# EAGLE board EE474FINAL (EAGLE 9.5.1)
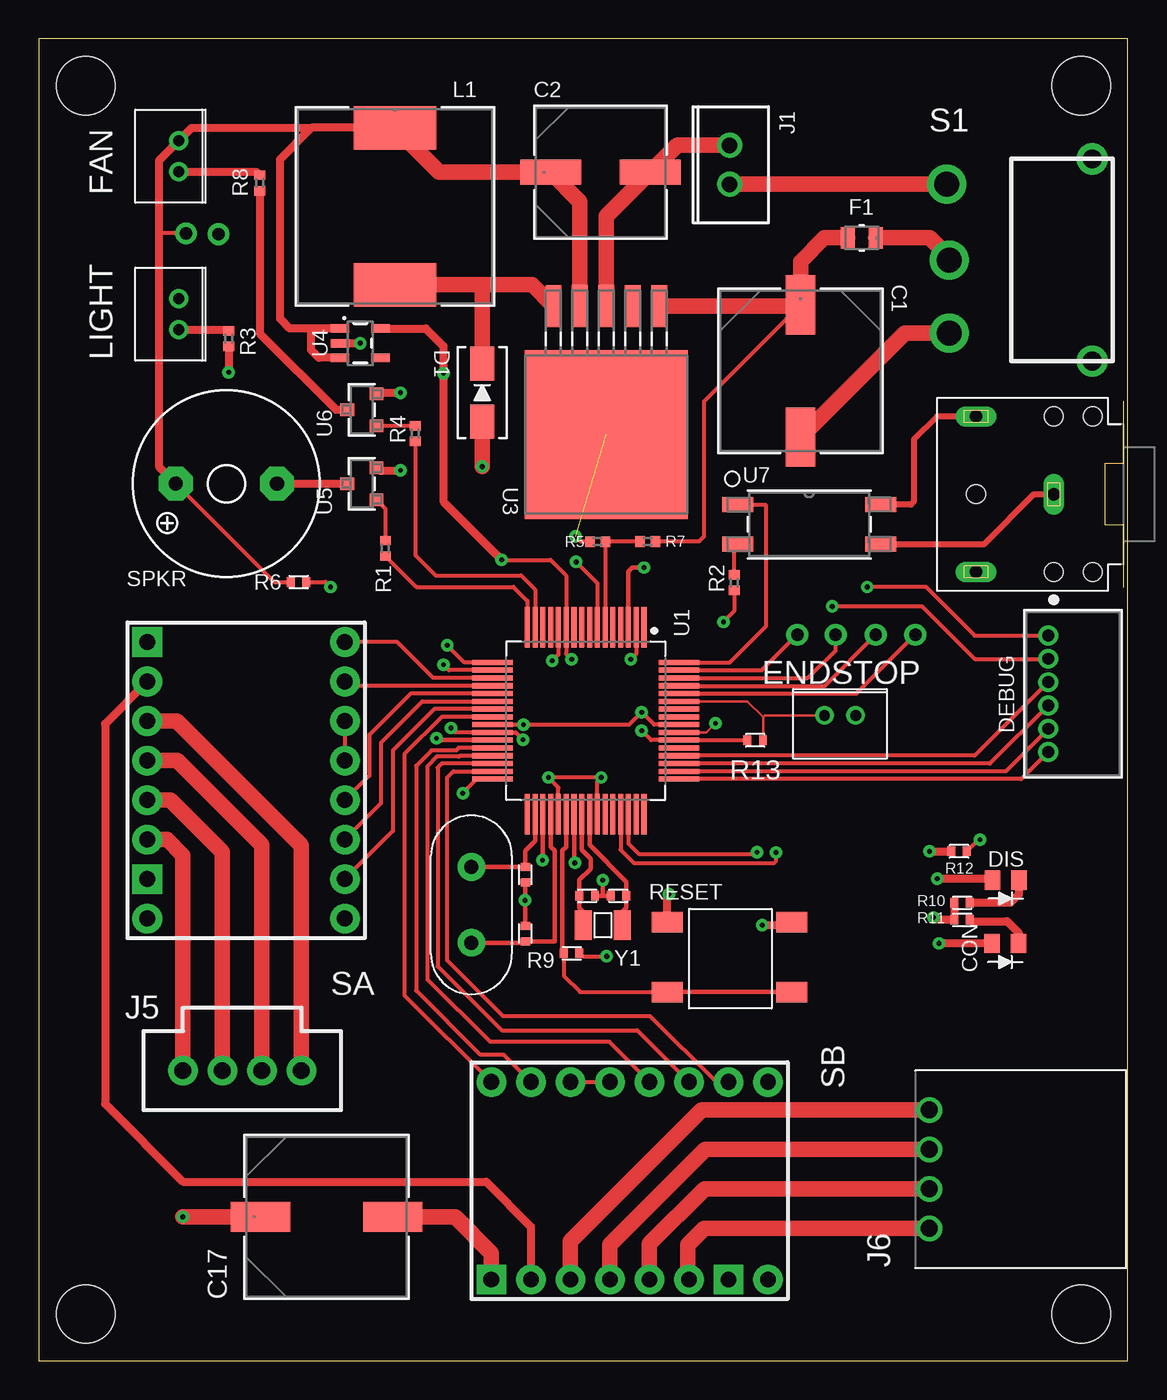
[diagram p0: board, top side]
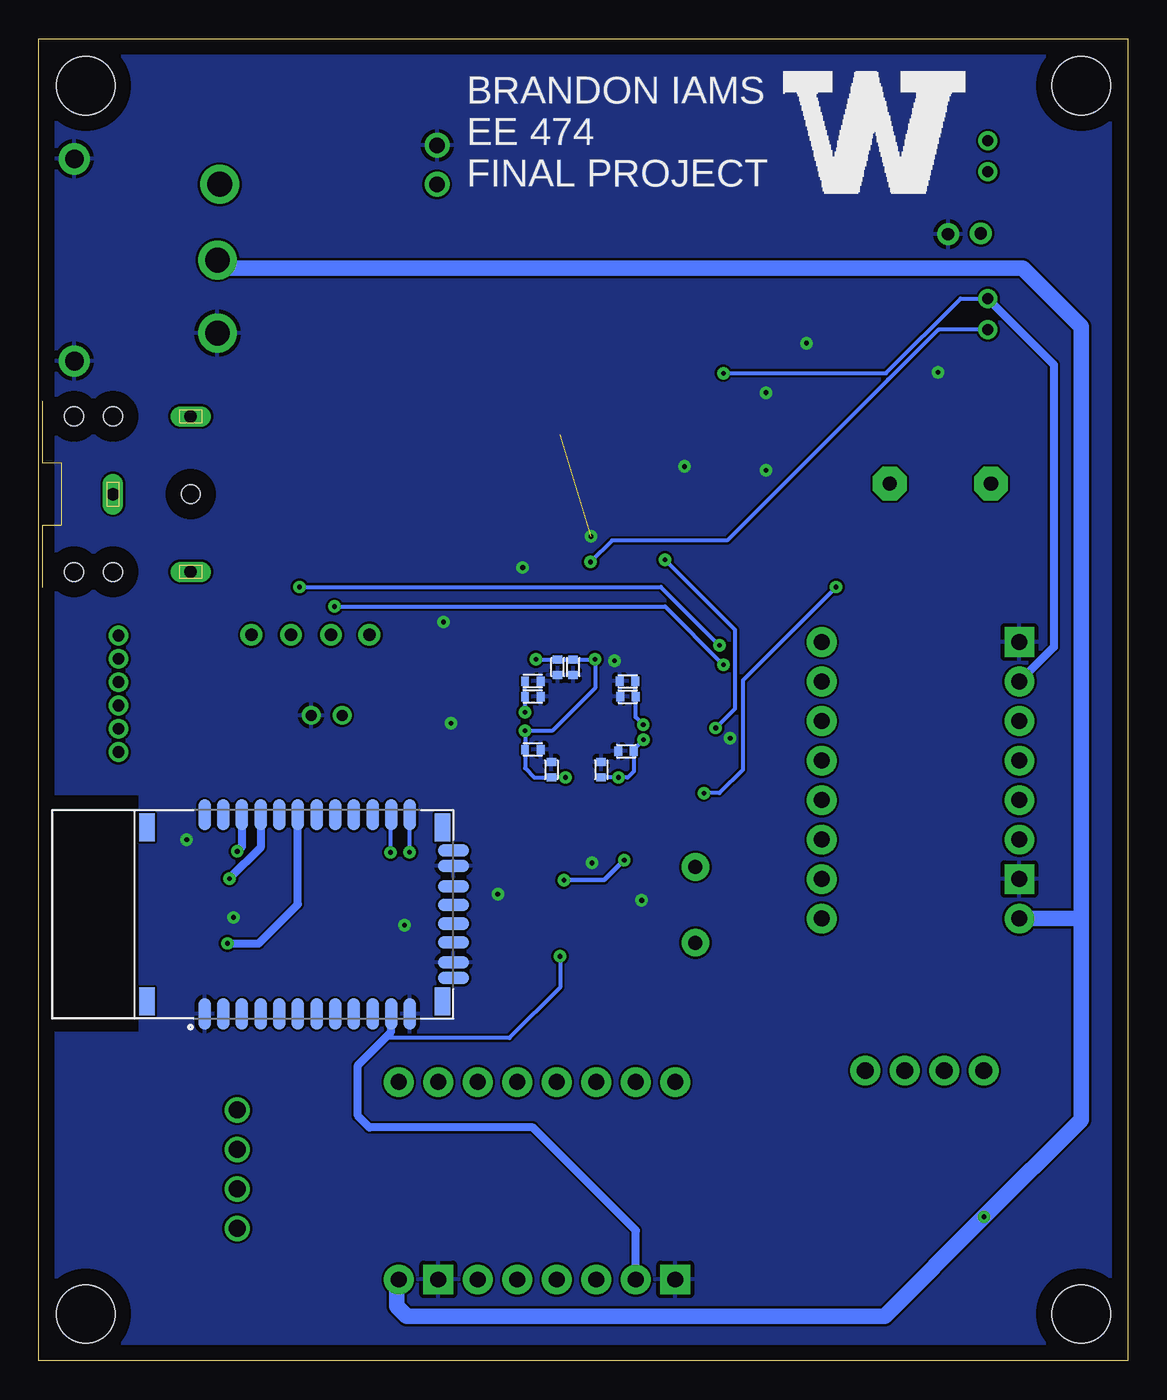
[diagram p1: board, bottom side, seen from below]

Size 70 x 85 mm. Coordinates in mm from the lower left corner, seen from the top.
Outline: 0,0 70,0 70,85 0,85 0,0
Copper layers (1*16): Top 0.035mm / dielectric 1.5mm / Bottom 0.035mm
Design rules "default *": minimum track width 3.5mil, minimum drill 0.3mm, track to track 6mil, track to pad 6mil, pad to pad 6mil, via to via 6mil, smd to smd 6mil, copper to edge 40mil, drill to drill 6mil, minimum pad ring 10mil, minimum via ring 8mil, stop-mask expansion 4mil, vias tented up to drill 0.9mm, thermal gap 10mil
Holes 3.75 mm at 67,3 3,3 3,82 67,82

## Footprints (pad centres in the part's own frame; a part is rotated, then mirrored left to right if it is on the bottom)
CAP_ULH_10X10 = smd 3.81 x 1.905: 1 -4.255,0; 2 4.255,0
CAP_UCD_8X6P2 = smd 3.912 x 1.626: 1 -3.2,0; 2 3.2,0
CAPC1005X35N = smd 0.512 x 0.612: 1 -0.5,0; 2 0.5,0
LED_511 = smd 1 x 1.25: P$1 -0.85,0; P$2 0.85,0
SMA = smd 2.18 x 1.528: 1 -1.857,0; 2 1.857,0
6POS_JST = drill 0.762 pad 1.27: 1 -7.493,0; 2 -5.994,0; 3 -4.496,0; 4 -2.997,0; 5 -1.499,0; 6 0,0
2POS_JSTVERT_2.00 = drill 0.7: 1 0,0; 2 2,0
FUS_VISHAY_MFU0805 = smd 0.902 x 1.397: 1 -0.895,0; 2 0.895,0
TESTPOINT = drill 0.8 pad 1.4: P$1 0,0
2POS_JSTVERT = drill 1 pad 1.6: P$1 0,0; P$2 2.5,0
AUDIOJACK = drill 0.8 long: 1 0,0; 2 5,-5; 3 5,5 | hole 1.2: -2.5,5; 0,5; 5,0; -2.5,-5; 0,-5
4POS_MOLEXVERT = drill 1.092 pad 1.905: P$1 0,0; P$2 2.54,0; P$3 5.08,0; P$4 7.62,0
MOLEX_0705530003 = drill 1.09: 1 0,0; 2 2.54,0; 3 5.08,0; 4 7.62,0
IND_BOURNS_SRR1210 = smd 2.794 x 5.309: 1 -5.042,0; 2 5.042,0
R0402 = smd 0.6 x 0.7: 1 -0.5,0; 2 0.5,0
SW_BS3 = smd 2 x 1.3: 1 4,-2.25; 2 -4,-2.25; 3 4,2.25; 4 -4,2.25
SLIDESWITCH = drill 1.6 pad 2.5: 1 -4.866,-0.148; 2 0,0; 3 4.7,0 | drill 1.2 pad 2: 4 -6.5,9.2; 5 6.5,9.2
DRV8825 = drill 1.016 pad 1.905: !EN 0,17.78; !FLT 12.7,2.54; !RST 0,7.62; !SLP 0,5.08; A1 12.7,7.62; A2 12.7,5.08; B1 12.7,10.16; B2 12.7,12.7; DIR 0,0; M0 0,15.24; M1 0,12.7; M2 0,10.16; STEP 0,2.54; VMOT 12.7,17.78 | drill 1.016 pad 1.905 square: GND$1 12.7,15.24; GND$2 12.7,0
F/QMBIII = drill 0.914 pad 2.159 octagon: + 3.251,0; - -3.251,0
TM3C123_FOOTPRINT = smd 2.6 x 0.322: 1 -6,3.75; 2 -6,3.25; 3 -6,2.75; 4 -6,2.25; 5 -6,1.75; 6 -6,1.25; 7 -6,0.75; 8 -6,0.25; 9 -6,-0.25; 10 -6,-0.75; 11 -6,-1.25; 12 -6,-1.75; 13 -6,-2.25; 14 -6,-2.75; 15 -6,-3.25; 16 -6,-3.75; 33 6,-3.75; 34 6,-3.25; 35 6,-2.75; 36 6,-2.25; 37 6,-1.75; 38 6,-1.25; 39 6,-0.75; 40 6,-0.25; 41 6,0.25; 42 6,0.75; 43 6,1.25; 44 6,1.75; 45 6,2.25; 46 6,2.75; 47 6,3.25; 48 6,3.75 | smd 0.322 x 2.6: 17 -3.75,-6; 18 -3.25,-6; 19 -2.75,-6; 20 -2.25,-6; 21 -1.75,-6; 22 -1.25,-6; 23 -0.75,-6; 24 -0.25,-6; 25 0.25,-6; 26 0.75,-6; 27 1.25,-6; 28 1.75,-6; 29 2.25,-6; 30 2.75,-6; 31 3.25,-6; 32 3.75,-6; 49 3.75,6; 50 3.25,6; 51 2.75,6; 52 2.25,6; 53 1.75,6; 54 1.25,6; 55 0.75,6; 56 0.25,6; 57 -0.25,6; 58 -0.75,6; 59 -1.25,6; 60 -1.75,6; 61 -2.25,6; 62 -2.75,6; 63 -3.25,6; 64 -3.75,6
XCVR_RN42-I/RM = smd 2 x 0.8: 1 -6.4,6.6; 2 -6.4,5.4; 3 -6.4,4.2; 4 -6.4,3; 5 -6.4,1.8; 6 -6.4,0.6; 7 -6.4,-0.6; 8 -6.4,-1.8; 9 -6.4,-3; 10 -6.4,-4.2; 11 -6.4,-5.4; 12 -6.4,-6.6; 13 6.4,-6.6; 14 6.4,-5.4; 15 6.4,-4.2; 16 6.4,-3; 17 6.4,-1.8; 18 6.4,-0.6; 19 6.4,0.6; 20 6.4,1.8; 21 6.4,3; 22 6.4,4.2; 23 6.4,5.4; 24 6.4,6.6 | smd 0.8 x 2: 28 3.1,-9.4; 29 -3.1,-9.4; 30 4.1,-9.4; 31 1.8,-9.4; 32 0.6,-9.4; 33 -0.6,-9.4; 34 -1.8,-9.4; 35 -4.1,-9.4 | smd 1.8 x 1: S1 -5.6,-8.7; S2 5.6,-8.7; S3 5.6,10.3; S4 -5.6,10.3
TS5B = smd 1.016 x 2.692: 1 -3.404,-8.28; 2 -1.702,-8.28; 3 0,-8.28; 4 1.702,-8.28; 5 3.404,-8.28 | smd 10.465 x 10.871: 6 0,0
SOT23-5 = smd 0.55 x 1.2: 1 -0.95,-1.3; 2 0,-1.3; 3 0.95,-1.3; 4 0.95,1.3; 5 -0.95,1.3
SOT-23 = smd 0.813 x 0.889: B -1.025,-0.945; C 0,0.945; E 1.025,-0.945
SOP-4L_TC = smd 2.007 x 0.94: 1 -4.597,1.27; 2 -4.597,-1.27; 3 4.597,-1.27; 4 4.597,1.27
GHI2_CRYSTAL_3.2X1.5 = smd 1.1 x 1.9: P$1 -1.25,0; P$2 1.25,0
CRYSTAL_16MHZ = drill 0.889 pad 1.778: 1 -2.44,0; 2 2.44,0

## Placement (x,y rotation side)
C1  [CAP_ULH_10X10]  48.97,63.64 270 top
C2  4.7uF  [CAP_UCD_8X6P2]  36.1,76.42 0 top
C3  24pF  [CAPC1005X35N]  35.25,29.9 0 top
C4  24pF  [CAPC1005X35N]  37.25,29.9 0 top
C5  10pF  [CAPC1005X35N]  31.27,31.25 90 top
C6  10pF  [CAPC1005X35N]  31.27,27.47 90 top
C7  .1uF  [CAPC1005X35N]  32.14,42.7 0 bottom
C8  .1uF  [CAPC1005X35N]  32.15,43.69 0 bottom
C9  1uF  [CAPC1005X35N]  38.25,43.7 180 bottom
C10  2.2uF  [CAPC1005X35N]  38.25,42.7 180 bottom
C11  .1uF  [CAPC1005X35N]  36.65,44.6 90 bottom
C12  .1uF  [CAPC1005X35N]  35.65,44.6 90 bottom
C13  .1uF  [CAPC1005X35N]  32.25,39.2 0 bottom
C14  .1uF  [CAPC1005X35N]  33.85,38 270 bottom
C15  .1uF  [CAPC1005X35N]  37.05,38 270 bottom
C16  .1uF  [CAPC1005X35N]  38.25,39.3 180 bottom
C17  [CAP_ULH_10X10]  18.5,9.25 0 top
CON  [LED_511]  62.13,26.83 180 top
D1  DIODE_SHOTKY_SMA  [SMA]  28.5,62.25 270 top
DEBUG  [6POS_JST]  64.88,46.63 90 top
DIS  [LED_511]  62.15,30.91 180 top
ENDSTOP  [2POS_JSTVERT_2.00]  50.5,41.5 0 top
F1  FUSE  [FUS_VISHAY_MFU0805]  52.89,72.2 180 top
FAN  [2POS_JSTVERT_2.00]  9,78.45 270 top
GND  [TESTPOINT]  11.55,72.44 90 bottom
J1  [2POS_JSTVERT]  44.4,75.65 90 top
J2  [AUDIOJACK]  65.24,55.72 180 top
J5  [4POS_MOLEXVERT]  9.26,18.65 0 top
J6  [MOLEX_0705530003]  57.25,8.5 90 top
L1  [IND_BOURNS_SRR1210]  22.89,74.23 270 top
LIGHT  [2POS_JSTVERT_2.00]  9,68.3 270 top
PD0  [TESTPOINT]  53.8,46.68 0 top
PD1  [TESTPOINT]  51.22,46.68 0 top
PD2  [TESTPOINT]  48.76,46.68 0 top
PE5  [TESTPOINT]  56.34,46.68 0 top
R1  [R0402]  22.28,52.24 90 top
R2  [R0402]  44.7,50.03 90 top
R3  [R0402]  12.2,65.72 90 top
R4  [R0402]  24.2,59.62 90 top
R5  [R0402]  35.92,52.66 0 top
R6  1M  [CAPC1005X35N]  16.7,50.07 0 top
R7  [R0402]  39.14,52.68 0 top
R8  [R0402]  14.2,75.73 90 top
R9  [CAPC1005X35N]  34.25,26.2 0 top
R10  [CAPC1005X35N]  59.35,29.45 0 top
R11  [CAPC1005X35N]  59.35,28.35 0 top
R12  [CAPC1005X35N]  59.15,32.75 180 top
R13  [CAPC1005X35N]  46.05,39.89 180 top
RESET  [SW_BS3]  44.4,25.95 0 top
S1  [SLIDESWITCH]  58.52,70.78 270 top
SA  [DRV8825]  19.67,46.21 180 top
SB  [DRV8825]  29.09,17.92 270 top
SPKR  F/QMBIII  [F/QMBIII]  12.05,56.4 180 top
TP1  [TESTPOINT]  9.45,72.49 90 top
U1  TM4C123_DEVICE  [TM3C123_FOOTPRINT]  35.15,41.15 270 top
U2  [XCVR_RN42-I/RM]  52.75,28.7 90 bottom
U3  [TS5B]  36.48,59.54 180 top
U4  3.3V  [SOT23-5]  20.66,65.43 270 top
U5  [SOT-23]  20.76,56.39 90 top
U6  [SOT-23]  20.76,61.15 90 top
U7  [SOP-4L_TC]  49.52,53.78 0 top
U$1  [LOGO_B]  10.5,74.5 0 top
Y1  32kHz  [GHI2_CRYSTAL_3.2X1.5]  36.25,28 180 top
Y2  Y2  [CRYSTAL_16MHZ]  27.8,29.31 90 top

## Library data of the parts
C1 C17 = FillControl; MANUFACTURER_PART_NUMBER: ULT2D180MNL1GS; VENDOR: Nichicon
C2 = FillControl; MANUFACTURER_PART_NUMBER: UUX2A4R7MCL1GS; VENDOR: Nichicon
C3-C16 CON DIS ENDSTOP FAN GND J1 J5 J6 LIGHT PD0 PD1 PD2 PE5 R6 R9-R13 RESET S1 SA SB TP1 U1 U$1 Y1 Y2 = MICROCONTROLLER
D1 = MICROCONTROLLER; MANUFACTURER_PART_NUMBER: S1M13F; VENDOR: Diodes Inc
DEBUG = MICROCONTROLLER; MANUFACTURER_PART_NUMBER: S6BZRLFSN; VENDOR: JST
F1 = FillControl; MANUFACTURER_PART_NUMBER: MFU0805FF02000P100; VENDOR: VISHAY
J2 = MICROCONTROLLER; AVAILABILITY: Unavailable; CUI_PURCHASE_URL: https://www.cuidevices.com/product/interconnect/connectors/audio-connectors/jacks/sj1-352xn-series?utm_source=snapeda.com&utm_medium=referral&utm_campaign=snapedaBOM; DESCRIPTION: 3.5 mm, Stereo, Right Angle, Through Hole, Audio Jack Connector; MF: CUI Devices; MP: SJ1-3523N; PACKAGE: None; PRICE: None
L1 = FillControl; MANUFACTURER_PART_NUMBER: SRR1210680M; VENDOR: Bourns Electronics
R1-R5 R7 R8 = rcl; SPICEPREFIX: R
SPKR = buzzer; OC_FARNELL: unknown; OC_NEWARK: unknown
U2 = MICROCONTROLLER; DESCRIPTION: Bluetooth Module; DIGI-KEY_PART_NUMBER: 740-1038-ND; DIGI-KEY_PURCHASE_URL: https://www.digikey.com/product-detail/en/microchip-technology/RN42-I-RM/740-1038-ND/2357707?utm_source=snapeda&utm_medium=aggregator&utm_campaign=symbol; MF: Microchip; MP: RN42-I/RM; PACKAGE: SMD-35 Roving Networks
U3 = FillControl; MANUFACTURER_PART_NUMBER: LM2596SX5.0NOPB; VENDOR: Texas Instruments
U4 = SparkFun-IC-Power; PROD_ID: VREG-12457
U5-U7 = FillControl

## Nets
20IN: J1.P$1 S1.1
!RST: R9.1 RESET.1 RESET.2 U1.38
!WAKE: R6.2 U1.32
+3V3: C11.2 C12.2 C13.2 C14.2 C15.2 C16.2 LIGHT.1 R9.2 R13.2 SA.!FLT SB.!FLT U1.2 U1.11 U1.26 U1.37 U1.42 U1.54 U2.11 U4.5
+5V: C2.1 FAN.1 L1.1 R6.1 SPKR.+ TP1.P$1 U3.4 U4.1 U4.3
+20V: C17.1 F1.1 S1.2 SA.VMOT SB.VMOT
BAT: R5.2 R7.1 U1.6
BUZZER: R1.1 U1.16
CTS: U2.16
DIR_A: SA.DIR U1.19
DIR_B: SB.DIR U1.24
FAN: R4.1 U1.15
FAN_OUT: FAN.2 R8.2
GND: C1.2 C2.2 C5.1 C6.2 C7.1 C8.1 C9.1 C10.1 C11.1 C12.1 C13.1 C14.1 C15.1 C16.1 C17.2 D1.2 ENDSTOP.2 GND.P$1 J1.P$2 R2.1 R3.1 R5.1 R10.1 R11.1 R12.1 RESET.3 RESET.4 S1.3 S1.4 S1.5 SA.GND$1 SA.GND$2 SB.GND$1 SB.GND$2 U1.3 U1.12 U1.27 U1.39 U1.55 U2.1 U2.12 U2.28 U2.29 U3.3 U3.6 U4.2 U5.E U6.E
GNDX: C3.2 C4.1 U1.35
LT: LIGHT.2 R3.2 U1.7
M0_A: SA.M0 U1.23
M0_B: SB.M0 U1.31
M1_A: SA.M1 U1.22
M1_B: SB.M1 U1.30
M2_A: SA.M2 U1.21
M2_B: SB.M2 U1.29
N$1: R1.2 U5.B
N$2: SPKR.- U5.C
N$3: J2.2 U7.4
N$4: J2.1 U7.3
N$5: J6.4 SB.A2
N$6: R2.2 U7.2
N$7: R4.2 U6.B
N$8: J5.P$4 SA.A2
N$9: J5.P$3 SA.A1
N$10: J5.P$2 SA.B1
N$11: J5.P$1 SA.B2
N$12: J6.3 SB.A1
N$13: J6.2 SB.B1
N$14: J6.1 SB.B2
N$15: ENDSTOP.1 R13.1 U1.59
N$16: SB.!RST SB.!SLP
N$17: SA.!RST SA.!SLP
N$18: DIS.P$2 U2.21
N$20: R8.1 U6.C
N$22: DIS.P$1 R10.2
N$23: CON.P$1 R11.2
N$24: CON.P$2 U2.19
N$25: R12.2 U2.22
OSC0: C3.1 U1.40 Y1.P$2
OSC1: C4.2 U1.41 Y1.P$1
PD0: PD0.P$1 U1.61
PD1: PD1.P$1 U1.62
PD2: PD2.P$1 U1.63
PE5: PE5.P$1 U1.60
PWM: D1.1 L1.2 U3.5
RTS: U2.15
RX-1: U1.46 U2.13
RXD: DEBUG.6 U1.17
STEP_A: SA.STEP U1.20
STEP_B: SB.STEP U1.28
TCK: DEBUG.4 U1.52
TDI: DEBUG.2 U1.50
TDO: DEBUG.1 U1.49
TMS: DEBUG.3 U1.51
TRIG: U1.64 U7.1
TX-0: U1.45 U2.14
TXD: DEBUG.5 U1.18
VDDC: C7.2 C8.2 C9.2 C10.2 U1.25 U1.56
VIN: C1.1 F1.2 R7.2 U3.1
XOSC0: C5.2 U1.34 Y2.2
XOSC1: C6.1 U1.36 Y2.1

## Tracks (layer width: path | path; a pad name or v marks a point on that pad's centre or on a via)
20IN
  Top 1: J1.P$1 54.9,75.65 S1.1
!RST
  Top 0.25: R9.1 33.75,24.75 34.8,23.7 RESET.2
  Top 0.3: U1.38 33.9,33.05 33.65,32.8 33.65,26.3 R9.1 | RESET.2 RESET.1
!WAKE  (via drill 0.3 pad 0.8)
  Top 0.25: R6.2 18.43,50.07 v18.75,49.75 | v27.25,36.5 28.15,37.4 U1.32
  Bottom 0.25: v18.75,49.75 24.75,43.75 24.75,38 26.25,36.5 v27.25,36.5
+3V3  (via drill 0.3 pad 0.8)
  Top 0.25: U1.42 35.9,37.25 v36.15,37.5 v32.75,37.5 33.4,36.85 U1.37 | v31.13,39.92 30.65,40.4 U1.26 26.77,40.4 v26.49,40.68 | v38.75,40.5 39.35,39.9 41,39.9 | U1.2 38.4,45.45 v38.05,45.1 | v34.25,45.1 33.9,45.45 U1.11 33.9,50.5 32.9,51.5 v29.75,51.5 | R9.2 34.95,26 v36.5,26 | U1.54 41,39.9 | R13.2 41.01,39.89 41,39.9
  Top 0.5: U4.5 24.87,66.38 26,65.25 v26,63.5 26,55.25 v29.75,51.5 | SA.!FLT 4.25,40.95 4.25,16.5 9.25,11.5 28.75,11.5 31.63,8.62 SB.!FLT
  Bottom 0.25: v31.13,39.92 31.75,39.3 C13.2 31.75,37.9 32.15,37.5 v32.75,37.5 C14.2 | v36.15,37.5 C15.2 38.15,37.5 38.75,38.1 C16.2 v38.75,40.5 37,40.5 34.25,43.25 v34.25,45.1 C12.2 C11.2 v38.05,45.1 | LIGHT.1 10.75,68.3 15.55,63.5 v26,63.5 | v26.49,40.68 25.25,41.92 25.25,47 v29.75,51.5 | v36.5,26 36.5,24 39.75,20.75 47.75,20.75
  Bottom 0.5: LIGHT.1 4.75,64.05 4.75,45.89 SA.!FLT | SB.!FLT 31.63,8.38 38.25,15 48.75,15 49.5,15.75 49.5,19 47.75,20.75 47.35,21.15 U2.11
+5V
  Top 0.25: SPKR.+ 15.13,50.07 R6.1 | TP1.P$1 7.76,72.49 7.75,72.5
  Top 0.5: L1.1 17.52,79.27 | 17.52,79.27 15.5,77.25 15.5,67 16.12,66.38 17.5,66.38 | 17.52,79.27 9.82,79.27 FAN.1 7.75,77.2 7.75,72.5 7.75,57.45 SPKR.+ | U4.1 17.5,66.38 | U4.3 19.34,64.5 18,64.5 17.5,65 17.5,66.38
  Top 1: U3.4 34.78,74.54 C2.1 25.74,76.42 L1.1
+20V  (via drill 0.3 pad 0.8)
  Top 1: F1.1 57.28,72.2 58.52,70.97 S1.2 | C17.1 v9.25,9.25
  Bottom 1: S1.2 57.99,70.25 6.75,70.25 3,66.5 3,28.5 | 3,28.5 3,15.5 v9.25,9.25 15.63,2.87 46.37,2.87 47,3.5 47,5.09 SB.VMOT | SA.VMOT 3.07,28.43 3,28.5
BAT
  Top 0.25: R7.1 36.44,52.68 R5.2 36.42,47.17 U1.6
BUZZER
  Top 0.25: R1.1 24.27,49.75 30.5,49.75 31.4,48.85 U1.16
DIR_A
  Top 0.25: U1.19 25.35,43.9 23.04,46.21 SA.DIR
DIR_B
  Top 0.25: U1.24 25.9,41.4 23.5,39 23.5,23.5 SB.DIR
FAN
  Top 0.25: R4.1 24.2,51.8 25.5,50.5 31,50.5 31.9,49.6 U1.15
FAN_OUT
  Top 0.5: FAN.2 13.98,76.45 R8.2
GND  (via drill 0.3 pad 0.8)  (1 unrouted)
  Top 0.152: U1.55 42.9,40.4 v43.5,41
  Top 0.25: U1.12 33.4,45.4 v33,45 | R2.1 44.7,48.2 v44,47.5 | R12.1 60.4,33.5 v60.5,33.5 | R5.1 34.84,52.66 v34.5,53
  Top 0.3: U1.39 34.4,32.06 v34.45,32.01 | U1.27 25.68,39.9 v25.56,40.02 | v38.9,51 38.15,51 37.9,50.75 U1.3 | C5.1 31.27,29.62 | 31.27,29.62 v31.25,29.6 | C6.2 31.27,29.62
  Top 0.5: U4.2 v20.66,65.43 | R3.1 v12.2,63.56 | U6.E 21.78,62.25 v23.25,62.25 | U5.E 21.87,57.25 v23.25,57.25 | R10.1 R11.1 57.65,28.35 v57.5,28.5 | RESET.3 48.4,28 v46.5,28 | RESET.4 40.4,30 v40.5,30
  Top 1: J1.P$2 41.03,78.15 C2.2 36.48,73.6 U3.3 | C17.2 26.75,9.25 29.09,6.91 SB.GND$2 | D1.2 v28.5,57.5 | C1.2 55.66,66.08 S1.3
  pour Bottom: 0.5,84.5 69.5,84.5 69.5,72.5 69.5,36.5 69,36.5 63.5,36.5 63.5,21 69.5,21 69.5,0.5 67,0.5 33.5,0.5 0.5,0.5
GNDX  (via drill 0.3 pad 0.8)
  Top 0.3: C3.2 36.25,29.9 | 36.25,29.9 C4.1 | 36.25,29.9 v36.25,30.9 | v32.37,32.19 32.4,32.22 U1.35
  Bottom 0.3: v36.25,30.9 33.66,30.9 v32.37,32.19
LT  (via drill 0.3 pad 0.8)
  Top 0.25: v34.54,51.36 35.9,50 U1.7
  Top 0.5: LIGHT.2 12.12,66.3 R3.2
  Bottom 0.25: LIGHT.2 12.18,66.3 15.38,63.1 15.4,63.1 25.75,52.75 33.15,52.75 v34.54,51.36
M0_A
  Top 0.25: U1.23 25.4,41.9 22.75,39.25 22.75,34.05 SA.M0
M0_B
  Top 0.25: SB.M0 43.53,17.92 39.3,22.15 29.85,22.15 26.25,25.75 26.25,37.5 26.65,37.9 U1.31
M1_A
  Top 0.25: SA.M1 22,35.85 22,39.75 24.65,42.4 U1.22
M1_B
  Top 0.25: U1.30 25.9,38.4 25.64,38.14 25.64,25.36 29.75,21.25 38.46,21.25 SB.M1
M2_A
  Top 0.25: U1.21 23.9,42.9 21.25,40.25 21.25,37.63 SA.M2
M2_B
  Top 0.25: SB.M2 36.67,20.5 29,20.5 24.97,24.53 24.97,38.22 25.59,38.84 27,38.84 27.06,38.9 U1.29
N$1
  Top 0.25: U5.B 22.28,54.79 R1.2
N$2
  Top 0.5: SPKR.- 19.8,56.4 U5.C
N$3
  Top 0.4: J2.2 57.72,60.72 56.25,59.25 56.25,55.25 56.05,55.05 U7.4
N$4
  Top 0.4: U7.3 60.76,52.51 63.97,55.72 J2.1
N$5
  Top 1: J6.4 42.62,16.12 34.17,7.67 SB.A2
N$6
  Top 0.25: R2.2 44.7,52.29 U7.2
N$7
  Top 0.25: U6.B R4.2
N$8
  Top 1: SA.A2 8.87,41.13 16.88,33.12 J5.P$4
N$9
  Top 1: SA.A1 8.91,38.59 14.34,33.16 J5.P$3
N$10
  Top 1: SA.B1 8.45,36.05 11.8,32.7 J5.P$2
N$11
  Top 1: SA.B2 8.24,33.51 9.26,32.49 J5.P$1
N$12
  Top 1: J6.3 42.83,13.58 36.71,7.46 SB.A1
N$13
  Top 1: J6.2 42.79,11.04 39.25,7.5 SB.B1
N$14
  Top 1: SB.B2 41.73,5.29 41.73,7.44 42.78,8.5 J6.1
N$15
  Top 0.152: 46.55,41.39 46.66,41.5 ENDSTOP.1 | U1.59 45.54,42.4 46.55,41.39 | 46.55,41.39 R13.1
N$16
  Top 0.25: SB.!SLP SB.!RST
N$17
  Top 0.25: SA.!SLP SA.!RST
N$18  (via drill 0.3 pad 0.8)
  Top 0.5: v57.75,31 61.21,31 DIS.P$2
  Bottom 0.5: U2.21 55.75,33 v57.75,31
N$20
  Top 0.5: R8.1 14.2,66.05 19.1,61.15 U6.C
N$22
  Top 0.5: DIS.P$1 63,30 62.45,29.45 R10.2
N$23
  Top 0.5: R11.2 59.95,28.25 62.25,28.25 62.98,27.52 CON.P$1
N$24  (via drill 0.3 pad 0.8)
  Top 0.5: CON.P$2 v57.87,26.83
  Bottom 0.5: v57.87,26.83 55.87,26.83 53.35,29.35 U2.19
N$25  (via drill 0.3 pad 0.8)
  Top 0.5: v57.25,32.75 R12.2
  Bottom 0.5: U2.22 56.95,33.05 v57.25,32.75
OSC0
  Top 0.3: Y1.P$2 35,28.85 34.75,29.1 C3.1 34.75,30.9 35.48,31.63 35.48,32.25 34.9,32.83 U1.40
OSC1
  Top 0.3: Y1.P$1 37.5,28.85 37.75,29.1 C4.2 37.75,30.8 35.4,33.15 U1.41
PD0
  Top 0.25: U1.61 50.52,43.4 PD0.P$1
PD1
  Top 0.25: U1.62 49.44,43.9 51.22,45.68 PD1.P$1
PD2
  Top 0.25: U1.63 46.48,44.4 PD2.P$1
PE5
  Top 0.25: U1.60 45.52,42.9 52.56,42.9 PE5.P$1
PWM
  Top 1: U3.5 31.71,69.19 28.5,69.19 | 28.5,69.19 L1.2 | D1.1 28.5,69.19
RX-1  (via drill 0.3 pad 0.8)
  Top 0.25: U1.46 37.9,33.25 38.55,32.6 46.07,32.6 v46.17,32.7
  Bottom 0.25: v46.17,32.7 46.17,35.08 U2.13
RXD  (via drill 0.3 pad 0.8)
  Top 0.25: U1.17 27.35,44.9 v26.25,46 | DEBUG.6 60.16,46.63 57.04,49.75 v53.25,49.75
  Bottom 0.25: v53.25,49.75 v53.24,49.76 30.01,49.76 v26.25,46
STEP_A
  Top 0.25: U1.20 19.94,43.4 SA.STEP
STEP_B
  Top 0.25: SB.STEP 29.88,19.67 28.38,19.67 24.25,23.8 24.25,38.25 25.24,39.24 26.83,39.24 26.99,39.4 U1.28
TCK
  Top 0.25: U1.52 60.15,38.9 DEBUG.4
TDI
  Top 0.25: DEBUG.2 62.14,37.9 U1.50
TDO
  Top 0.25: DEBUG.1 63.14,37.4 U1.49
TMS
  Top 0.25: DEBUG.3 61.14,38.39 U1.51
TRIG
  Top 0.25: U7.1 46.7,55.05 46.75,55 46.75,47.25 44.4,44.9 U1.64
TX-0  (via drill 0.3 pad 0.8)
  Top 0.25: U1.45 37.4,32.85 38.25,32 47.25,32 47.39,32.14 v47.39,32.68
  Bottom 0.25: v47.39,32.68 47.39,35.06 U2.14
TXD  (via drill 0.3 pad 0.8)
  Top 0.25: U1.18 26.35,44.4 v26,44.75 | DEBUG.5 60.16,45.13 56.8,48.49 v51.01,48.49 v51,48.5
  Bottom 0.25: v26,44.75 29.75,48.5 v51,48.5
VDDC  (via drill 0.3 pad 0.8)
  Top 0.25: U1.56 39.55,40.9 v38.75,41.7 37.95,40.9 v31.15,40.9
  Top 0.27: U1.25 v31.15,40.9
  Bottom 0.25: v31.15,40.9 31.64,41.39 C7.2 C8.2 | v38.75,41.7 38.75,42.68 C10.2 | C10.2 C9.2
  Bottom 0.27: C10.2
VIN
  Top 0.25: C1.1 42.75,61.67 42.75,53 42.43,52.68 R7.2
  Top 1: U3.1 48.9,67.82 C1.1 48.97,70.67 50.49,72.2 F1.2
XOSC0
  Top 0.3: Y2.2 C5.2 31.27,32.78 31.9,33.41 U1.34
XOSC1
  Top 0.3: U1.36 32.9,33.05 33.15,32.8 33.15,26.97 C6.1 31.17,26.87 Y2.1

## Text on the board
bPlace: BRANDON IAMS / EE 474 / FINAL PROJECT